# EAGLE board batteryBalancer (EAGLE 8.0.0)
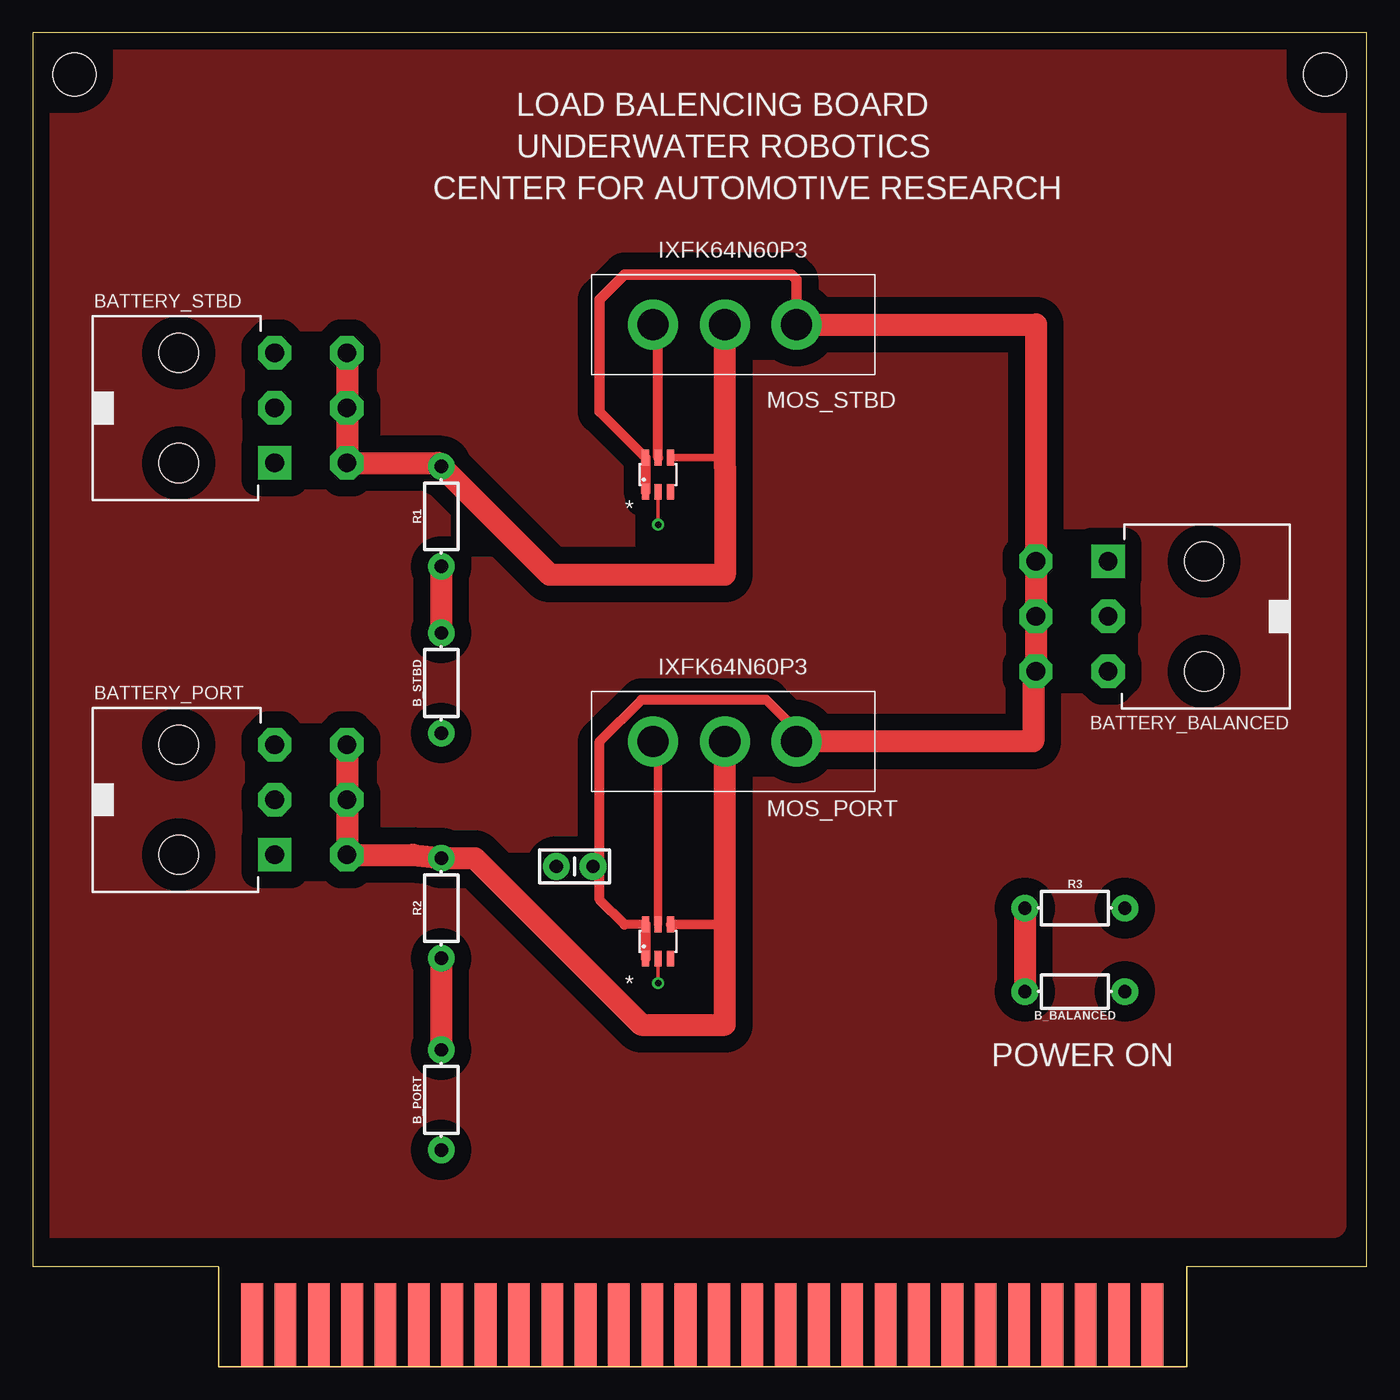
[diagram p0: board, top side]
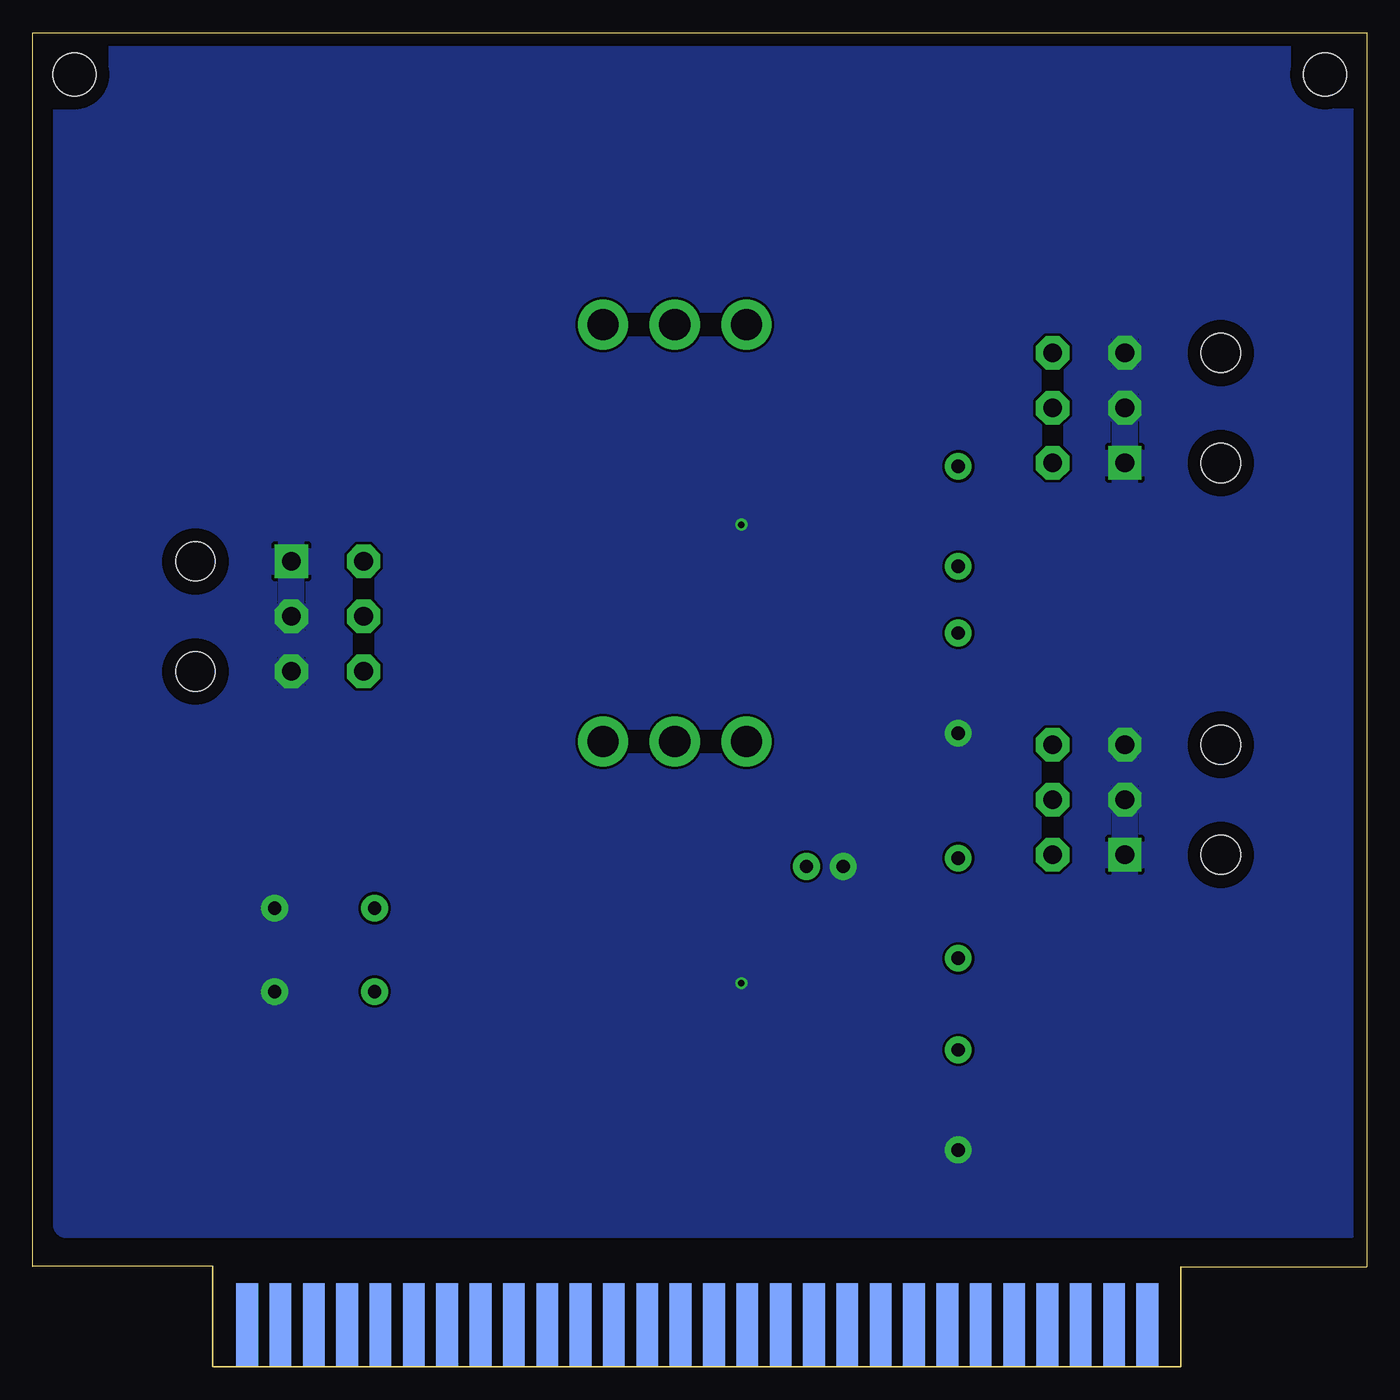
[diagram p1: board, bottom side, seen from below]

Size 101.6 x 101.6 mm. Coordinates in mm from the lower left corner, seen from the top.
Outline: 101.6,7.62 101.6,7.64
Outline: 14.17,7.19 14.17,7.62 0,7.62 0,101.6 101.6,101.6 101.6,9.5 101.6,7.64
Outline: 87.86,7.64 101.6,7.64
Copper layers (1*16): Top 0.035mm / dielectric 1.5mm / Bottom 0.035mm
Design rules "default": minimum track width 10mil, minimum drill 24mil, track to track 8mil, track to pad 8mil, pad to pad 8mil, via to via 8mil, smd to smd 8mil, copper to edge 40mil, drill to drill 8mil, minimum pad ring 10mil, minimum via ring 8mil, stop-mask expansion 4mil, vias tented up to drill 0mil, thermal gap 10mil
Holes 3.26 mm at 3.17,98.42 98.42,98.42

## Footprints (pad centres in the part's own frame; a part is rotated, then mirrored left to right if it is on the bottom)
AXIAL-0.3-KIT = drill 1.016 pad 2.032: P$1 -3.81,0; P$2 3.81,0
39-30-?06? = drill 1.422 pad 2.54 square: 1 4.191,0 | drill 1.422 pad 2.54 octagon: 2 0,0; 3 -4.191,0; 4 4.191,5.512; 5 0,5.512; 6 -4.191,5.512 | hole 3: -4.191,-7.3; 4.191,-7.3
CAP-PTH-SMALL-KIT = drill 1.016 pad 2.032: 1 -1.397,0; 2 1.397,0
IXFK64N60P3 = drill 2.388 pad 3.81: DRAIN 5.461,0; GATE -5.461,0; SOURCE 0,0
SOT23-6 = smd 0.55 x 1.2: 1 -0.95,-1.3; 2 0,-1.3; 3 0.95,-1.3; 4 0.95,1.3; 5 0,1.3; 6 -0.95,1.3
5530843-6-BOARDFINGERS = smd 1.651 x 6.35: 5VP1 0.826,3.175; 5VP2 3.365,3.175; 5VP3 5.905,3.175; 5VP4 8.445,3.175; 5VP5 10.986,3.175; 5VP6 13.525,3.175; 12VP1 16.066,3.175; 12VP2 18.605,3.175; 12VP3 21.145,3.175; 12VP4 23.686,3.175; 12VP5 26.226,3.175; 12VP6 28.765,3.175; 12VP7 31.305,3.175; 12VP8 33.846,3.175; 12VP9 36.386,3.175; 12VP10 38.925,3.175; CAN1 41.465,3.175; CAN2 44.005,3.175; ESC1 46.545,3.175; ESC2 49.086,3.175; ESC3 51.626,3.175; ESC4 54.166,3.175; ESC5 56.706,3.175; KILL_SWITCH 59.245,3.175; SCL_ESC 69.406,3.175; SCL_SENSOR 64.326,3.175; SDA_ESC 66.865,3.175; SDA_SENSOR 61.785,3.175 | smd 1.651 x 6.35 bottom: EXTRA1 69.406,3.175; EXTRA2 66.865,3.175; EXTRA3 64.326,3.175; EXTRA4 61.785,3.175; EXTRA5 59.245,3.175; EXTRA6 56.706,3.175; EXTRA7 54.166,3.175; EXTRA8 51.626,3.175; EXTRA9 49.086,3.175; EXTRA10 46.545,3.175; EXTRA11 44.005,3.175; EXTRA12 41.465,3.175; EXTRA13 38.925,3.175; EXTRA14 36.386,3.175; GND1 0.826,3.175; GND2 3.365,3.175; GND3 5.905,3.175; GND4 8.445,3.175; GND5 10.986,3.175; GND6 13.525,3.175; GND7 16.066,3.175; GND8 18.605,3.175; GND9 21.145,3.175; GND10 23.686,3.175; GND11 26.226,3.175; GND12 28.765,3.175; GND13 31.305,3.175; GND14 33.846,3.175

## Placement (x,y rotation side)
B_BALANCED  1k  [AXIAL-0.3-KIT]  79.38,28.57 180 top
B_PORT  1k  [AXIAL-0.3-KIT]  31.11,20.32 90 top
B_STBD  1k  [AXIAL-0.3-KIT]  31.11,52.07 90 top
BATTERY_BALANCED  39-30-06?  [39-30-?06?]  81.92,57.15 90 top
BATTERY_PORT  39-30-06?  [39-30-?06?]  18.41,43.18 270 top
BATTERY_STBD  39-30-06?  [39-30-?06?]  18.41,73.03 270 top
C1  0.1uF  [CAP-PTH-SMALL-KIT]  41.27,38.1 180 top
MOS_PORT  IXFK64N60P3  [IXFK64N60P3]  52.7,47.62 0 top
MOS_STBD  IXFK64N60P3  [IXFK64N60P3]  52.7,79.38 0 top
R1  1k  [AXIAL-0.3-KIT]  31.11,64.77 90 top
R2  1k  [AXIAL-0.3-KIT]  31.11,34.92 90 top
R3  1k  [AXIAL-0.3-KIT]  79.38,34.92 0 top
U$3  LM5050-1  [SOT23-6]  47.62,67.94 0 top
U$4  LM5050-1  [SOT23-6]  47.62,32.38 0 top
U$5  5530843  [5530843-6-BOARDFINGERS]  15.88,0 0 top

## Library data of the parts
B_BALANCED B_PORT B_STBD R1-R3 = SparkFun-Resistors; PROD_ID: RES-08380
BATTERY_BALANCED BATTERY_PORT BATTERY_STBD = con-molex-mini-fit
C1 = SparkFun-Capacitors; PROD_ID: CAP-08370
MOS_PORT MOS_STBD = IXFK64N60P3
U$3 U$4 = lio
U$5 = 5530843-6

## Nets
BALENCED_LOAD: BATTERY_BALANCED.4 BATTERY_BALANCED.5 BATTERY_BALANCED.6 C1.1 MOS_PORT.DRAIN MOS_STBD.DRAIN U$3.1 U$3.6 U$4.1 U$4.6
BAT_GND: B_BALANCED.P$1 B_PORT.P$1 B_STBD.P$1 BATTERY_BALANCED.1 BATTERY_BALANCED.2 BATTERY_BALANCED.3 BATTERY_PORT.1 BATTERY_PORT.2 BATTERY_PORT.3 BATTERY_STBD.1 BATTERY_STBD.2 BATTERY_STBD.3 C1.2 R3.P$2 U$3.2 U$4.2
GATE1: MOS_STBD.GATE U$3.5
GATE2: MOS_PORT.GATE U$4.5
LOAD_1: BATTERY_STBD.4 BATTERY_STBD.5 BATTERY_STBD.6 MOS_STBD.SOURCE R1.P$2 U$3.4
LOAD_2: BATTERY_PORT.4 BATTERY_PORT.5 BATTERY_PORT.6 MOS_PORT.SOURCE R2.P$2 U$4.4
N$2: B_BALANCED.P$2 R3.P$1
N$3: B_STBD.P$2 R1.P$1
N$4: B_PORT.P$2 R2.P$1

## Tracks (layer width: path | path; a pad name or v marks a point on that pad's centre or on a via)
BALENCED_LOAD
  Top 0.686: U$4.6 45.05,33.69
  Top 0.762: U$3.1 U$3.6 43.18,72.74 | MOS_PORT.DRAIN 58.17,48.51 55.88,50.8 46.35,50.8 43.18,47.62 43.18,38.1 | C1.1 43.18,38.1 | 45.05,33.69 43.18,35.56 43.18,38.1 | U$4.6 U$4.1
  Top 0.813: MOS_STBD.DRAIN 58.17,82.8 57.78,83.19 45.09,83.19 43.18,81.28 43.18,72.74 | 46.67,33.66 U$4.6
  Top 1.676: MOS_STBD.DRAIN 76.4,79.38 BATTERY_BALANCED.4 BATTERY_BALANCED.5 BATTERY_BALANCED.6 76.2,52.96 76.2,47.62 MOS_PORT.DRAIN
BAT_GND  (via drill 0.5)
  Top 0.254: v47.62,29.21 U$4.2 | U$3.2 v47.62,64.14
  pour Bottom: 1.27,100.33 99.06,100.33 99.06,10.79 1.27,10.79
GATE1
  Top 0.762: U$3.5 47.62,78.99
  Top 0.813: 47.62,78.99 MOS_STBD.GATE
GATE2
  Top 0.254: MOS_PORT.GATE 47.24,47.37 47.62,46.99
  Top 0.635: 47.62,46.99 U$4.5
GND
  pour Top (isolate 1.27): 1.27,100.33 99.06,100.33 99.06,10.79 1.27,10.79
LOAD_1
  Top 0.559: 48.6,69.22 U$3.4 52.7,69.25
  Top 0.61: 52.7,69.25 52.7,68.58
  Top 1.676: BATTERY_STBD.6 BATTERY_STBD.5 BATTERY_STBD.4 30.86,68.83 R1.P$2 39.37,60.33 52.7,60.33 52.7,68.58 MOS_STBD.SOURCE
LOAD_2
  Top 0.762: U$4.4 48.92,33.69 52.7,33.66
  Top 1.676: BATTERY_PORT.6 BATTERY_PORT.5 BATTERY_PORT.4 28.96,38.99 R2.P$2 33.66,38.73 46.35,26.04 52.7,26.04 52.7,33.66 MOS_PORT.SOURCE
N$2
  Top 1.676: R3.P$1 B_BALANCED.P$2
N$3
  Top 1.676: R1.P$1 B_STBD.P$2
N$4
  Top 1.676: R2.P$1 B_PORT.P$2

## Text on the board
tPlace: LOAD BALENCING BOARD | UNDERWATER ROBOTICS | CENTER FOR AUTOMOTIVE RESEARCH | MOS_STBD | * | MOS_PORT | * | POWER ON